# EAGLE board TSC_PROIECT2026_PCB.fbrd (EAGLE 9.7.0)
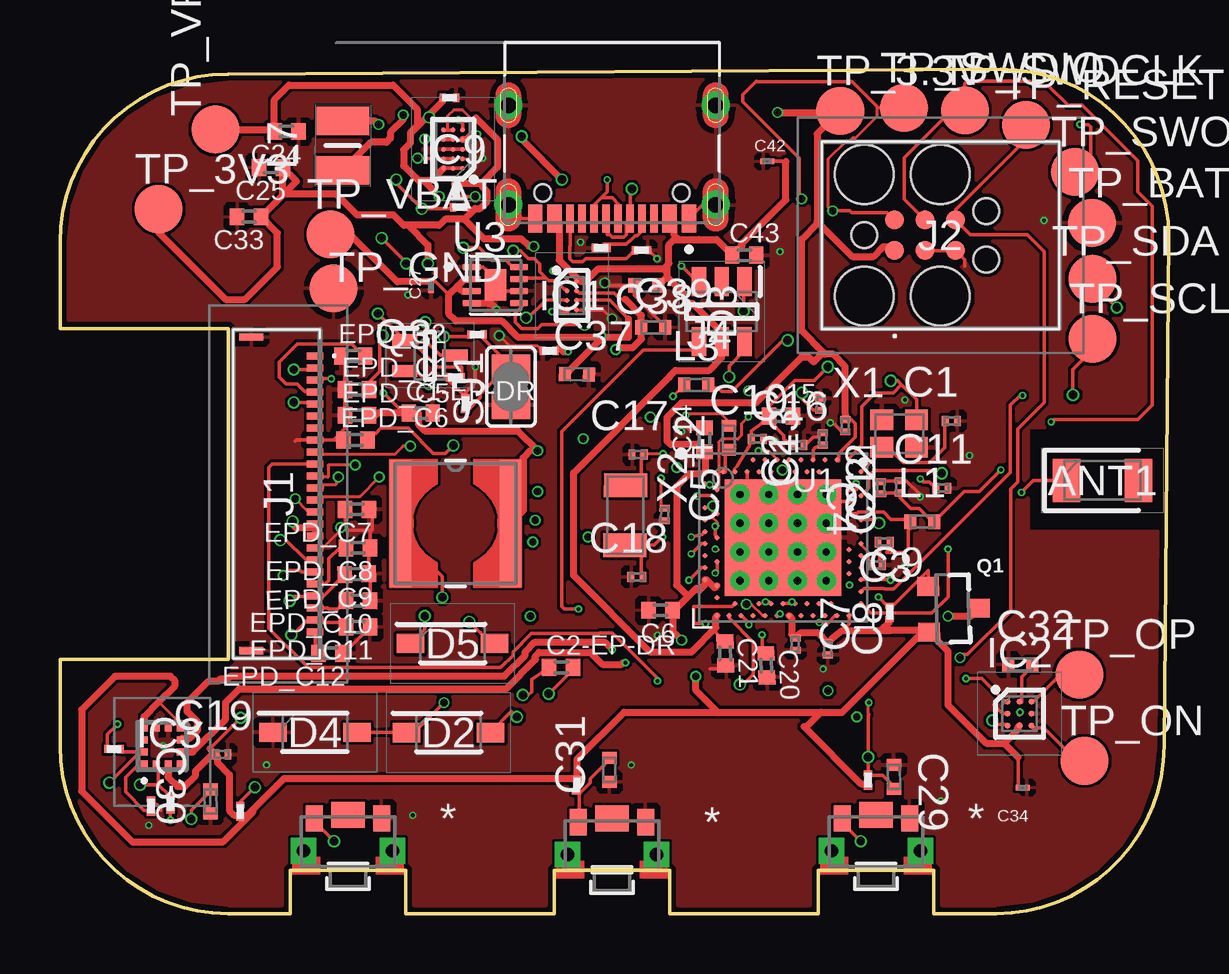
[diagram p0: board, top side]
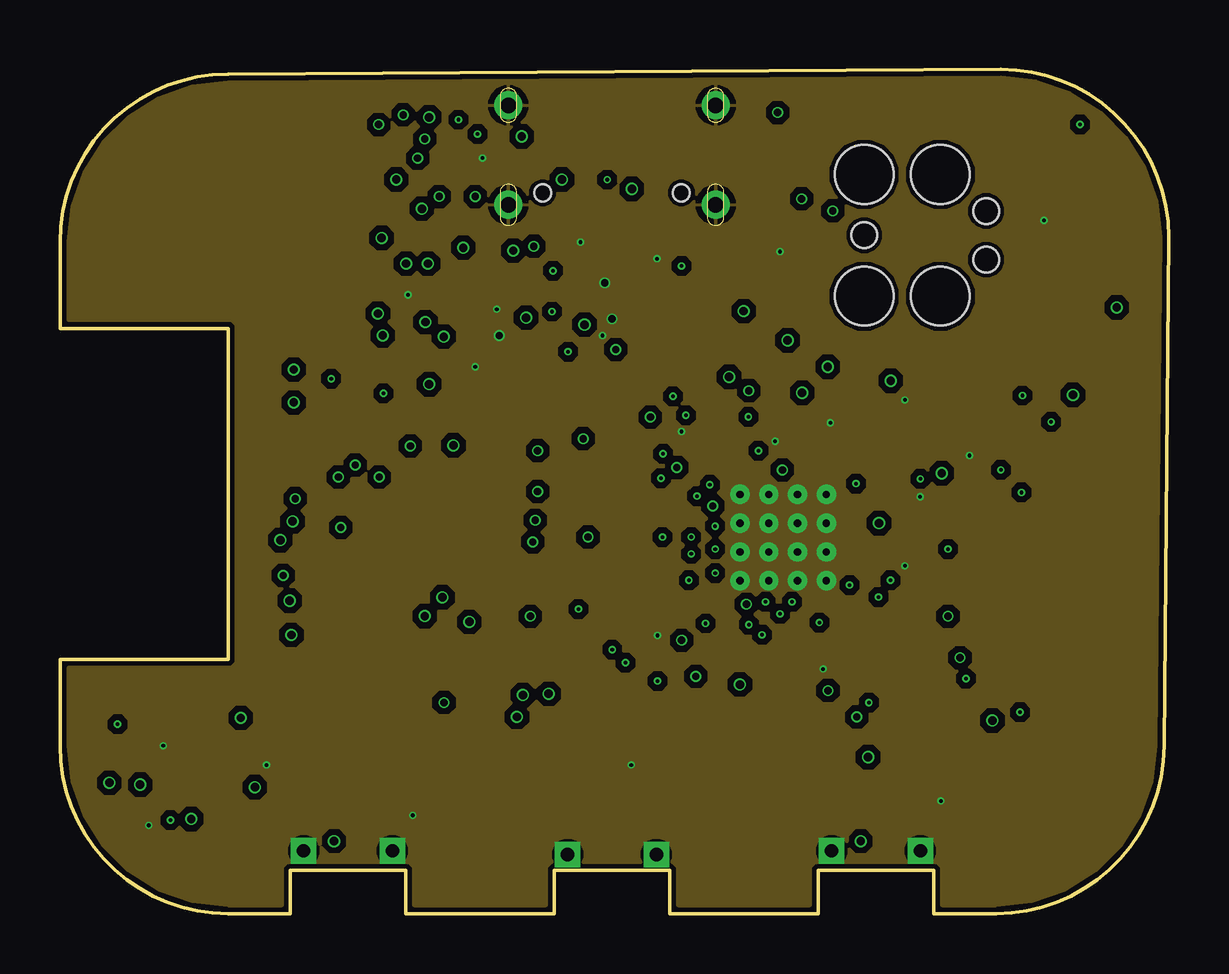
[diagram p1: board, inner layer Route2]
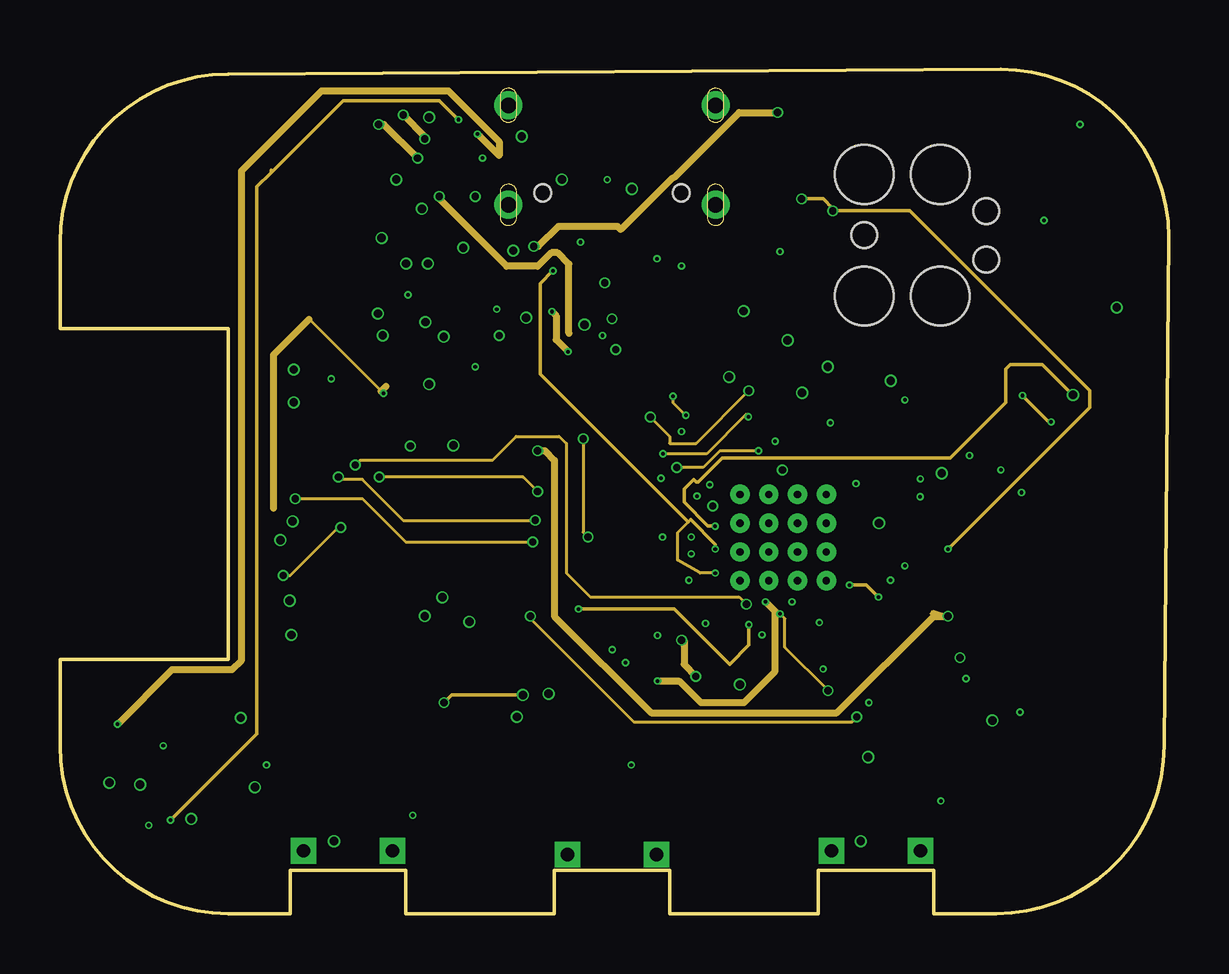
[diagram p2: board, inner layer Route63]
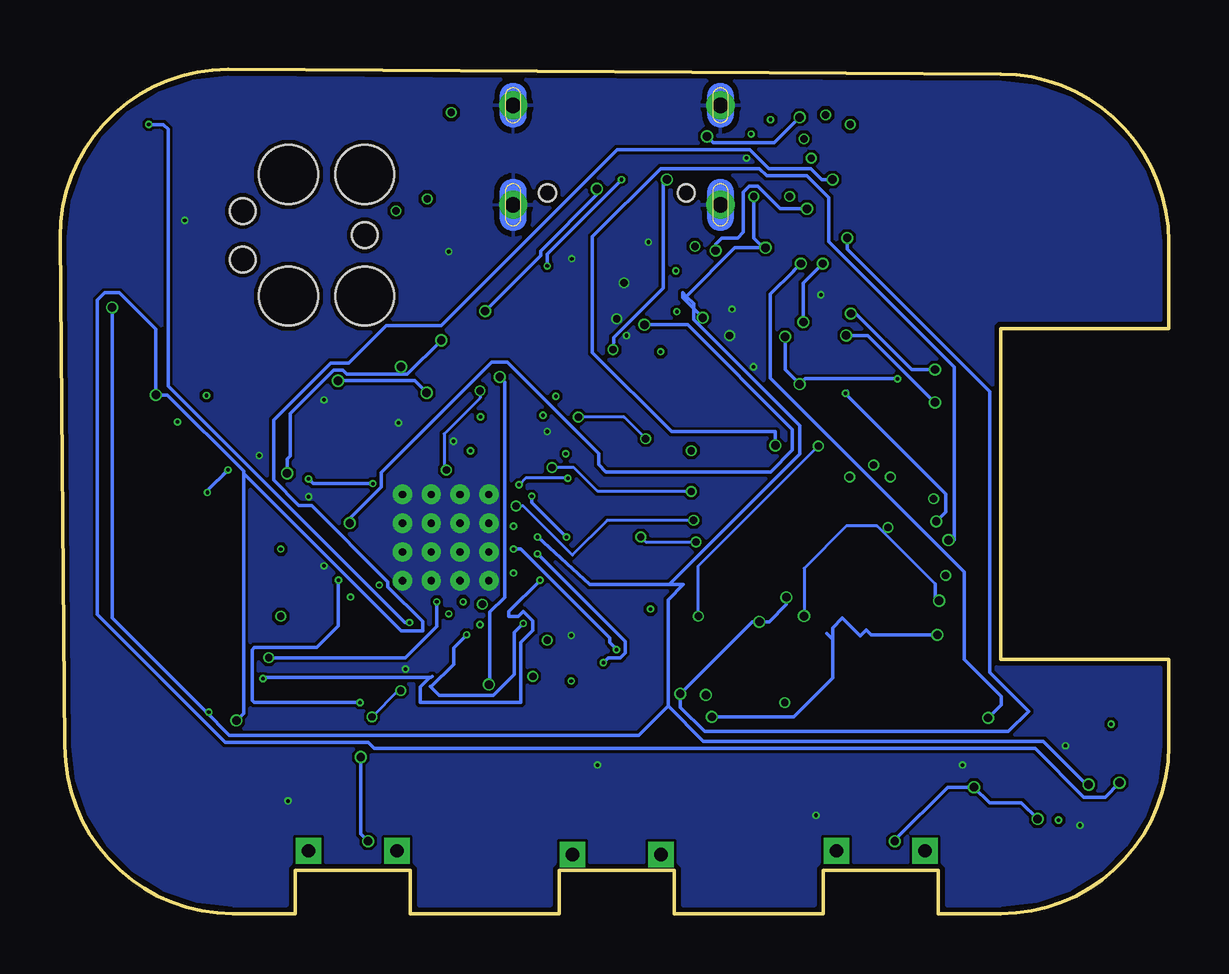
[diagram p3: board, bottom side, seen from below]

Size 46.2 x 35.2 mm. Coordinates in mm from the lower left corner, seen from the top.
Outline: 39,0 36.4,0 36.4,1.8 31.6,1.8 31.6,0 25.4,0 25.4,1.8 20.6,1.8 20.6,0 14.4,0 14.4,1.8 9.6,1.8 9.6,0 7,0 arc-90 0,7 0,10.6 7,10.6 7,24.4 0,24.4 0,28 arc-90 7,35 39.2,35.2 arc-90 46.2,28.2 46,7 arc-90 39,0
Copper layers (1+2*15+16): Top / Route2 / Route63 / Bottom
Stack-up 4 Layer Stack: Top SilkScreen Epoxy Ink / Top SolderMask SR:Green 0.0254mm Dk 4.3 / Top Surface Finish Lead-Free 0.02mm / Top CuFoil:007 0.035mm / Dielectric-1 Prepreg:001 0.064mm / Dielectric-2 Prepreg:001 0.064mm / Route2 CuFoil:007 0.035mm / Dielectric-3 Core:066 0.711mm / Route63 CuFoil:007 0.035mm / Dielectric-4 Prepreg:001 0.064mm / Dielectric-5 Prepreg:001 0.064mm / Bottom CuFoil:007 0.035mm / Bottom Surface Finish Lead-Free 0.02mm / Bottom SolderMask SR:Green 0.0254mm Dk 4.3 / Bottom SilkScreen Epoxy Ink
Design rules: minimum copper width 5mil, minimum drill size 0.15mm, copper clearance wire_polygon to wire_polygon 5mil, copper clearance wire_polygon to pad_smd 5mil, copper clearance wire_polygon to via 5mil, copper clearance pad_smd to pad_smd 5mil, copper clearance pad_smd to via 5mil, copper clearance via to via 5mil, copper clearance smd to pad (same net) 5mil, copper clearance smd to via (same net) 5mil, copper clearance smd to smd (same net) 5mil, dimension clearance 0.2mm, via restrict clearance 0mil, restrict clearance 0mil, drill distance 6mil, keepout clearance 0mil
RestrictTop: area 40.4,16 to 46.2,20.2

## Footprints (pad centres in the part's own frame; a part is rotated, then mirrored left to right if it is on the bottom)
2450AT18B100E_ANTC3216X140N = smd 1.15 x 1.8: 1 -1.5,0; 2 1.5,0
NORDIC_NRF_3_RESC0201_L = smd 0.28 x 0.43: 1 -0.255,0; 2 0.255,0
PERFECT_0402_0402 = smd 0.6 x 0.7: 1 -0.5,0; 2 0.5,0
GRM011R60J152KE01L_1_0201 = smd 0.35 x 0.25: 1 0,0.275; 2 0,-0.275
GRM011R60J152KE01L_2_CAPC0201X13N = smd 0.22 x 0.23: 1 -0.185,0; 2 0.185,0
NORDIC_NRF_3_RESC0402_L = smd 0.5 x 0.6: 1 -0.5,0; 2 0.5,0
ESP32_C6_LIBRARY_5_SOD3716X135N = smd 1.15 x 0.8: 1 -1.75,0; 2 1.75,0
ESP32_C6_LIBRARY_3_SOT95P280X145-6N = smd 1.2 x 0.6: 1 -1.25,0.95; 2 -1.25,0; 3 -1.25,-0.95; 4 1.25,-0.95; 5 1.25,0; 6 1.25,0.95
BQ25180YBGR_BGA8C40P2X4_100X155X50 = smd 0.2 x 0.2: A1 -0.2,0.6; A2 0.2,0.6; B1 -0.2,0.2; B2 0.2,0.2; C1 -0.2,-0.2; C2 0.2,-0.2; D1 -0.2,-0.6; D2 0.2,-0.6
DRV2605YZFR_BGA9C50P3X3_144X144X62 = smd 0.25 x 0.25: A1 -0.5,0.5; A2 0,0.5; A3 0.5,0.5; B1 -0.5,0; B2 0,0; B3 0.5,0; C1 -0.5,-0.5; C2 0,-0.5; C3 0.5,-0.5
BMA423_BMA423 = smd 0.3 x 0.35: 1 -0.75,-0.775; 2 -0.25,-0.775; 3 0.25,-0.775; 4 0.75,-0.775; 7 0.75,0.775; 8 0.25,0.775; 9 -0.25,0.775; 10 -0.75,0.775 | smd 0.35 x 0.3: 5 0.775,-0.25; 6 0.775,0.25; 11 -0.775,0.25; 12 -0.775,-0.25
RT6160AWSC_BGA15C40P3X5_140X230X60 = smd 0.216 x 0.216: A1 -0.4,0.8; A2 0,0.8; A3 0.4,0.8; B1 -0.4,0.4; B2 0,0.4; B3 0.4,0.4; C1 -0.4,0; C2 0,0; C3 0.4,0; D1 -0.4,-0.4; D2 0,-0.4; D3 0.4,-0.4; E1 -0.4,-0.8; E2 0,-0.8; E3 0.4,-0.8
503480-2400_5034802400 = smd 0.3 x 0.7: 1 -5.75,1.525; 2 -5.25,1.525; 3 -4.75,1.525; 4 -4.25,1.525; 5 -3.75,1.525; 6 -3.25,1.525; 7 -2.75,1.525; 8 -2.25,1.525; 9 -1.75,1.525; 10 -1.25,1.525; 11 -0.75,1.525; 12 -0.25,1.525; 13 0.25,1.525; 14 0.75,1.525; 15 1.25,1.525; 16 1.75,1.525; 17 2.25,1.525; 18 2.75,1.525; 19 3.25,1.525; 20 3.75,1.525; 21 4.25,1.525; 22 4.75,1.525; 23 5.25,1.525; 24 5.75,1.525 | smd 0.3 x 1: MP1 -6.54,-1.125; MP2 6.54,-1.125
TC2030-IDC_TC2030IDC = smd 0.783 x 0.783: 1 -0.953,-0.635; 2 -0.953,0.635; 3 0.317,-0.635; 4 0.317,0.635; 5 1.588,-0.635; 6 1.588,0.635 | hole 2.451: -2.223,-2.54; -2.223,2.54; 0.952,-2.54; 0.952,2.54 | hole 1.067: -2.223,0; 2.857,-1.016; 2.857,1.016
KH-TYPE-C-16P_KINGHELM_KH-TYPE-C-16P = smd 0.6 x 1.15: A1_B12 -3.2,4.725; A4_B9 -2.4,4.725; A9_B4 2.4,4.725; A12_B1 3.2,4.725 | smd 0.3 x 1.15: A5 -1.25,4.725; A6 -0.25,4.725; A7 0.25,4.725; A8 1.25,4.725; B5 1.75,4.725; B6 0.75,4.725; B7 -0.75,4.725; B8 -1.75,4.725 | drill 0.65 pad 1.05: SH1 -4.32,0; SH2 4.32,0; SH3 -4.32,4.15; SH4 4.32,4.15 | hole 0.7: -2.89,3.65; 2.89,3.65
NORDIC_NRF_2_RESC0402_L = smd 0.5 x 0.6: 1 -0.5,0; 2 0.5,0
ESP32_C6_LIBRARY_2_IND_4828-WE-TPC_WRE = smd 0.9 x 5.3: 1 -2.286,0; 2 2.286,0
MLP2016SR47MT0S1_INDC2016X100N = smd 1.2 x 2.2: 1 -1.028,0; 2 1.028,0
ESP32_C6_LIBRARY_4_ESP32_C6_LIBRARY_4_ESP32_C6_LIBRARY_4_ESP32_C6_LIBRARY_4_ESP32_WROVER_SPARKFUN-DISCRETESEMI_SOT23-3 = smd 0.8 x 0.9: 1 -0.95,-1; 2 0.95,-1; 3 0,1.1
ESP32_C6_LIBRARY_6_SOT65P210X110-3N = smd 1.05 x 0.5: 1 -1.05,0.65; 2 -1.05,-0.65; 3 1.05,0
ERA-1AEB3401C_0201 = smd 0.35 x 0.25: 1 0,0.275; 2 0,-0.275
CPF0201D7K68C1_0201 = smd 0.35 x 0.25: 1 0,0.275; 2 0,-0.275
ESP32_C6_LIBRARY_7_JUMPER_SJ = smd 1.168 x 1.6: 1 -0.762,0; 2 0.762,0
2025-10-22_07-23-44_LIBRARY_SW_EVP-AKE31A_PAN = smd 0.711 x 1.092: 1 -1.4,-0.972; 2 1.4,-0.972 | drill 0.559 pad 0.914 square: 3 -1.848,0.381; 4 1.848,0.381 | smd 1.397 x 1.092: 5 0,-1.124
HECTOR_WATCH_1_TP20R = smd 2 x 2: TP 0,0
NORDIC_NRF_4_AQFN50P700X700X85_HS-74N = smd 4.85 x 4.85: P$74 0,0 | drill 0.3 pad 0.6: P$75 -1.8,1.8; P$76 -0.6,1.8; P$77 0.6,1.8; P$78 1.8,1.8; P$79 -1.8,0.6; P$80 -0.6,0.6; P$81 0.6,0.6; P$82 1.8,0.6; P$83 -1.8,-0.6; P$84 -0.6,-0.6; P$85 0.6,-0.6; P$86 1.8,-0.6; P$87 -1.8,-1.8; P$88 -0.6,-1.8; P$89 0.6,-1.8; P$90 1.8,-1.8 | smd 0.2 x 0.2: P$A8 -1.25,3.25; P$A10 -0.75,3.25; P$A12 -0.25,3.25; P$A14 0.25,3.25; P$A16 0.75,3.25; P$A18 1.25,3.25; P$A20 1.75,3.25; P$A22 2.25,3.25; P$A23 2.75,3.25; P$AA24 3.25,-2.25; P$AB2 -2.75,-2.5; P$AC5 -2,-2.75; P$AC9 -1,-2.75; P$AC11 -0.5,-2.75; P$AC13 0,-2.75; P$AC15 0.5,-2.75; P$AC17 1,-2.75; P$AC19 1.5,-2.75; P$AC21 2,-2.75; P$AC24 3.25,-2.75; P$AD2 -2.75,-3.25; P$AD4 -2.25,-3.25; P$AD6 -1.75,-3.25; P$AD8 -1.25,-3.25; P$AD10 -0.75,-3.25; P$AD12 -0.25,-3.25; P$AD14 0.25,-3.25; P$AD16 0.75,-3.25; P$AD18 1.25,-3.25; P$AD20 1.75,-3.25; P$AD22 2.25,-3.25; P$AD23 2.75,-3.25; P$B1 -3.25,2.75; P$B3 -2.5,2.75; P$B5 -2,2.75; P$B7 -1.5,2.75; P$B9 -1,2.75; P$B11 -0.5,2.75; P$B13 0,2.75; P$B15 0.5,2.75; P$B17 1,2.75; P$B19 1.5,2.75; P$B24 3.25,2.75; P$C1 -3.25,2.25; P$D2 -2.75,2; P$D23 2.75,2; P$E24 3.25,1.75; P$F2 -2.75,1.5; P$F23 2.75,1.5; P$G1 -3.25,1.25; P$H2 -2.75,1; P$H23 2.75,1; P$J1 -3.25,0.75; P$J24 3.25,0.75; P$K2 -2.75,0.5; P$L1 -3.25,0.25; P$L24 3.25,0.25; P$M2 -2.75,0; P$N1 -3.25,-0.25; P$N24 3.25,-0.25; P$P2 -2.75,-0.5; P$P23 2.75,-0.5; P$R1 -3.25,-0.75; P$R24 3.25,-0.75; P$T2 -2.75,-1; P$T23 2.75,-1; P$U1 -3.25,-1.25; P$U24 3.25,-1.25; P$V23 2.75,-1.5; P$W1 -3.25,-1.75; P$W24 3.25,-1.75; P$Y2 -2.75,-2; P$Y23 2.75,-2
ESP32_C6_LIBRARY_SON50P200X200X80-9N = smd 0.76 x 0.27: 1 -0.985,0.75; 2 -0.985,0.25; 3 -0.985,-0.25; 4 -0.985,-0.75; 5 0.985,-0.75; 6 0.985,-0.25; 7 0.985,0.25; 8 0.985,0.75 | smd 0.9 x 1.3: 9 0,0
NORDIC_NRF_BT-XTAL_2016_N = smd 0.95 x 0.85: 1 -0.725,-0.575; 2 0.725,-0.575; 3 0.725,0.575; 4 -0.725,0.575
NORDIC_NRF_1_XTAL_3215_N = smd 1 x 1.8: 1 -1.25,0; 2 1.25,0

## Placement (x,y rotation side)
ANT1  2450AT18B100E_2450AT18B100E  [2450AT18B100E_ANTC3216X140N]  43.44,18.06 0 top
C1  12pF  [NORDIC_NRF_3_RESC0201_L]  37.14,20.54 0 top
C1-EP-DR  10uF  [PERFECT_0402_0402]  15.03,20.87 0 top
C2  12pF  [NORDIC_NRF_3_RESC0201_L]  31.69,21.24 89.5 top
C2-EP-DR  4.7uF/25V  [PERFECT_0402_0402]  20.88,10.27 0 top
C3  1pF  [NORDIC_NRF_3_RESC0201_L]  34.34,15.49 180 top
C4  1pF  [NORDIC_NRF_3_RESC0201_L]  34.2,17.76 90.4 top
C5  100nF  [NORDIC_NRF_3_RESC0201_L]  25.19,16.64 268.9 top
C6  4.7uF  [PERFECT_0402_0402]  25.03,12.65 180 top
C7  100nF  [NORDIC_NRF_3_RESC0201_L]  30.64,11.24 270 top
C8  100nF  [NORDIC_NRF_3_RESC0201_L]  31.99,11.04 270 top
C9  820pF N.C.  [NORDIC_NRF_3_RESC0201_L]  34,14.54 0 top
C10  N.C.  [NORDIC_NRF_3_RESC0201_L]  29.06,19.79 0 top
C11  100pF  [NORDIC_NRF_3_RESC0201_L]  36.74,17.74 0 top
C12  100nF  [NORDIC_NRF_3_RESC0201_L]  32.72,20.34 270 top
C13  N.C.  [NORDIC_NRF_3_RESC0201_L]  31.78,19.79 90 top
C14  4.7uF  [PERFECT_0402_0402]  26.85,19.75 90 top
C15  1.0uF  [PERFECT_0402_0402]  30.04,20.75 0 top
C16  47nF  [NORDIC_NRF_3_RESC0201_L]  30.74,19.54 0 top
C17  12pF  [NORDIC_NRF_3_RESC0201_L]  24.09,19.14 0 top
C18  12pF  [NORDIC_NRF_3_RESC0201_L]  24.04,14.04 0 top
C19  100nF  [NORDIC_NRF_3_RESC0201_L]  6.74,6.64 0 top
C20  4.7uF  [PERFECT_0402_0402]  29.43,10.35 272.4 top
C21  4.7uF  [PERFECT_0402_0402]  27.72,10.85 271.7 top
C22  N.C.  [NORDIC_NRF_3_RESC0201_L]  35,17.79 90 top
C23  0.1uF  [GRM011R60J152KE01L_1_0201]  16.23,34.01 269.1 top
C24  10uF  [PERFECT_0402_0402]  9.43,32.61 180 top
C25  22uF  [PERFECT_0402_0402]  8.79,31.11 180 top
C27  0.1uF  [GRM011R60J152KE01L_2_CAPC0201X13N]  15.45,26.16 90 top
C29  1uF  [NORDIC_NRF_3_RESC0402_L]  34.75,5.7 270.5 top
C30  1uF  [NORDIC_NRF_3_RESC0402_L]  6.27,4.69 90.2 top
C31  1uF  [NORDIC_NRF_3_RESC0402_L]  22.89,5.99 90 top
C32  1uF  [NORDIC_NRF_3_RESC0402_L]  40.01,10.39 0 top
C33  22uF  [PERFECT_0402_0402]  7.88,29.05 180 top
C34  0.1uF  [GRM011R60J152KE01L_2_CAPC0201X13N]  40.11,5.26 179.6 top
C37  1uF  [NORDIC_NRF_3_RESC0402_L]  21.54,22.49 359.1 top
C38  1uF  [NORDIC_NRF_3_RESC0402_L]  24.42,26.19 0 top
C39  10uF  [NORDIC_NRF_3_RESC0402_L]  24.72,24.44 0 top
C42  0.1uF  [GRM011R60J152KE01L_2_CAPC0201X13N]  29.47,31.36 0 top
C43  4.7uF  [PERFECT_0402_0402]  28.51,27.45 0 top
D2  MBR0530  [ESP32_C6_LIBRARY_5_SOD3716X135N]  16.19,7.55 0 top
D3  USBLC6-2SC6Y  [ESP32_C6_LIBRARY_3_SOT95P280X145-6N]  27.57,25.1 270 top
D4  MBR0530  [ESP32_C6_LIBRARY_5_SOD3716X135N]  10.62,7.56 0 top
D5  MBR0530  [ESP32_C6_LIBRARY_5_SOD3716X135N]  16.36,11.26 0 top
EPD_C1  1uF/50V  [PERFECT_0402_0402]  12.37,21.85 0 top
EPD_C2  1uF/50V  [PERFECT_0402_0402]  12.22,23.25 0 top
EPD_C5  1uF/50V  [PERFECT_0402_0402]  12.37,20.78 0 top
EPD_C6  1uF/50V  [PERFECT_0402_0402]  12.32,19.75 0 top
EPD_C7  1uF/50V  [PERFECT_0402_0402]  12.37,16.85 180 top
EPD_C8  1uF/50V  [PERFECT_0402_0402]  12.42,15.25 180 top
EPD_C9  1uF/50V  [PERFECT_0402_0402]  12.37,14.15 182.1 top
EPD_C10  1uF/50V  [PERFECT_0402_0402]  12.42,13.05 179.4 top
EPD_C11  1uF/50V  [PERFECT_0402_0402]  12.42,11.95 180 top
EPD_C12  1uF/50V  [PERFECT_0402_0402]  11.27,10.85 180 top
IC1  BQ25180YBGR  [BQ25180YBGR_BGA8C40P2X4_100X155X50]  21.33,25.77 0 top
IC2  DRV2605YZFR  [DRV2605YZFR_BGA9C50P3X3_144X144X62]  39.98,8.34 0 top
IC3  BMA423  [BMA423_BMA423]  4.26,6.99 0 top
IC9  RT6160AWSC  [RT6160AWSC_BGA15C40P3X5_140X230X60]  16.38,31.87 180 top
J1  503480-2400  [503480-2400_5034802400]  9.1,17.5 270 top
J2  TC2030-IDC  [TC2030-IDC_TC2030IDC]  35.73,28.28 0 top
J4  KH-TYPE-C-16P  [KH-TYPE-C-16P_KINGHELM_KH-TYPE-C-16P]  23,33.7 180 top
L1  3.9nH  [NORDIC_NRF_2_RESC0402_L]  35.92,16.34 0 top
L2  10uH  [NORDIC_NRF_2_RESC0402_L]  27.87,19.84 89.6 top
L3  15nH  [NORDIC_NRF_2_RESC0402_L]  26.52,22.04 0 top
L5  68uH  [ESP32_C6_LIBRARY_2_IND_4828-WE-TPC_WRE]  16.48,16.27 0 top
L7  FTC252012SR47MBCA  [MLP2016SR47MT0S1_INDC2016X100N]  11.79,32.02 269.7 top
Q1  20V/4.2A/52mΩ/1.4W  [ESP32_C6_LIBRARY_4_ESP32_C6_LIBRARY_4_ESP32_C6_LIBRARY_4_ESP32_C6_LIBRARY_4_ESP32_WROVER_SPARKFUN-DISCRETESEMI_SOT23-3]  37.19,12.71 271.2 top
Q3  SI1308EDL-T1-GE3  [ESP32_C6_LIBRARY_6_SOT65P210X110-3N]  15.41,23.26 0 top
R1_EP_DR  0.47  [ERA-1AEB3401C_0201]  17.38,24.15 271.2 top
R1_USB  5K1  [CPF0201D7K68C1_0201]  22.55,27.76 90 top
R2  0  [ERA-1AEB3401C_0201]  4.61,4.59 0 top
R2_EP_DR  10K  [ERA-1AEB3401C_0201]  16.47,22.36 90.2 top
R2_USB  5K1  [CPF0201D7K68C1_0201]  24.23,27.66 90.3 top
R3  0  [CPF0201D7K68C1_0201]  3.79,4.49 0 top
R4  0  [ERA-1AEB3401C_0201]  2.25,6.86 268.8 top
R5  10k  [CPF0201D7K68C1_0201]  7.51,4.26 0 top
R7  10k  [CPF0201D7K68C1_0201]  33.67,5.57 0 top
R8  10k  [CPF0201D7K68C1_0201]  21.53,5.36 176.4 top
R9  10K  [ERA-1AEB3401C_0201]  20.39,23.46 90 top
R17  3K3  [ERA-1AEB3401C_0201]  16.65,29.46 272 top
R18  3K3  [ERA-1AEB3401C_0201]  16.51,30.15 1.4 top
R_PWR_EPD  10K  [CPF0201D7K68C1_0201]  34.57,12.56 0 top
R_TYPE_SEL  2.2  [ERA-1AEB3401C_0201]  16.89,21.26 358.6 top
SJ1  0  [ESP32_C6_LIBRARY_7_JUMPER_SJ]  18.79,21.97 90 top
SW_DN  2025-10-22_07-23-44_LIBRARY_EVP-AKE31ASW_EVP-AKE31A_PAN  [2025-10-22_07-23-44_LIBRARY_SW_EVP-AKE31A_PAN]  34,3 180 top
SW_ENT  2025-10-22_07-23-44_LIBRARY_EVP-AKE31ASW_EVP-AKE31A_PAN  [2025-10-22_07-23-44_LIBRARY_SW_EVP-AKE31A_PAN]  23,2.85 180 top
SW_UP  2025-10-22_07-23-44_LIBRARY_EVP-AKE31ASW_EVP-AKE31A_PAN  [2025-10-22_07-23-44_LIBRARY_SW_EVP-AKE31A_PAN]  12,3 180 top
TP_3.3V  HECTOR_WATCH_1_TPTP20R  [HECTOR_WATCH_1_TP20R]  32.51,33.47 0 top
TP_3V3  HECTOR_WATCH_1_TPTP20R  [HECTOR_WATCH_1_TP20R]  4.11,29.37 0 top
TP_BAT_GND  HECTOR_WATCH_1_TPTP20R  [HECTOR_WATCH_1_TP20R]  43,28.79 0 top
TP_GND  HECTOR_WATCH_1_TPTP20R  [HECTOR_WATCH_1_TP20R]  11.4,26.07 0 top
TP_ON  HECTOR_WATCH_1_TPTP20R  [HECTOR_WATCH_1_TP20R]  42.69,6.37 0 top
TP_OP  HECTOR_WATCH_1_TPTP20R  [HECTOR_WATCH_1_TP20R]  42.47,9.97 0 top
TP_RESET  HECTOR_WATCH_1_TPTP20R  [HECTOR_WATCH_1_TP20R]  40.25,32.89 0 top
TP_SCL  HECTOR_WATCH_1_TPTP20R  [HECTOR_WATCH_1_TP20R]  43.03,23.97 0 top
TP_SDA  HECTOR_WATCH_1_TPTP20R  [HECTOR_WATCH_1_TP20R]  43.02,26.47 0 top
TP_SWDCLK  HECTOR_WATCH_1_TPTP20R  [HECTOR_WATCH_1_TP20R]  37.7,33.49 0 top
TP_SWDIO  HECTOR_WATCH_1_TPTP20R  [HECTOR_WATCH_1_TP20R]  35.17,33.59 0 top
TP_SWO  HECTOR_WATCH_1_TPTP20R  [HECTOR_WATCH_1_TP20R]  42.29,30.92 0 top
TP_VBAT  HECTOR_WATCH_1_TPTP20R  [HECTOR_WATCH_1_TP20R]  11.28,28.32 0 top
TP_VREG  HECTOR_WATCH_1_TPTP20R  [HECTOR_WATCH_1_TP20R]  6.48,32.69 0 top
U1  NRF52840_QF  [NORDIC_NRF_4_AQFN50P700X700X85_HS-74N]  30.13,15.68 0 top
U3  MAX17048G+T10  [ESP32_C6_LIBRARY_SON50P200X200X80-9N]  18.14,26.21 0 top
X1  32MHz  [NORDIC_NRF_BT-XTAL_2016_N]  34.96,20.01 0 top
X2  32.768kHz  [NORDIC_NRF_1_XTAL_3215_N]  23.55,16.61 269.2 top

## Library data of the parts
ANT1 = InkTime_v5 (1); ARROW_PART_NUMBER: 2450AT18B100E; ARROW_PRICE-STOCK: https://www.arrow.com/en/products/2450at18b100e/johanson-dielectrics?utm_currency=USD&region=nac; DESCRIPTION: Antennas 2.45GHz ANTENNA; HEIGHT: 1.4mm; MANUFACTURER_NAME: JOHANSON TECHNOLOGY; MANUFACTURER_PART_NUMBER: 2450AT18B100E; MOUSER_PART_NUMBER: 609-2450AT18B100E; MOUSER_PRICE-STOCK: https://www.mouser.co.uk/ProductDetail/Johanson-Technology/2450AT18B100E?qs=yCnrNFeXz%252Bh5MFsFIXGZGA%3D%3D
C1 C1-EP-DR C2 C2-EP-DR C3-C25 C29-C33 C37-C39 C43 EPD_C1 EPD_C2 EPD_C5-EPD_C12 L1-L3 R1_EP_DR R1_USB R2 R2_EP_DR R2_USB R3-R5 R7-R9 R17 R18 R_PWR_EPD R_TYPE_SEL SJ1 TP_3.3V TP_3V3 TP_BAT_GND TP_GND TP_ON TP_OP TP_RESET TP_SCL TP_SDA TP_SWDCLK TP_SWDIO TP_SWO TP_VBAT TP_VREG U1 X1 X2 = InkTime_v5 (1)
C27 C34 C42 = InkTime_v5 (1); AVAILABILITY: In Stock; CHECK_PRICES: https://www.snapeda.com/parts/GRM011R60J152KE01L/Murata/view-part/?ref=eda; DESCRIPTION: SMD Capacitor X5R(EIA) with Capacitance: 1500pF Tol. 10%. Rated Voltage: 6.3Vdc; MF: Murata; MP: GRM011R60J152KE01L; PACKAGE: 0201 Murata; PRICE: None; SNAPEDA_LINK: https://www.snapeda.com/parts/GRM011R60J152KE01L/Murata/view-part/?ref=snap
D2 D4 D5 = InkTime_v5 (1); AVAILABILITY: In Stock; CHECK_PRICES: https://www.snapeda.com/parts/MBR0530/Onsemi/view-part/?ref=eda; DESCRIPTION: Diode Schottky 30 V 500mA Surface Mount SOD-123; MF: ON Semiconductor; MP: MBR0530; PACKAGE: SOD-123-2 ON Semiconductor; PRICE: None; PURCHASE-URL: https://www.snapeda.com/api/url_track_click_mouser/?unipart_id=179458&manufacturer=ON Semiconductor&part_name=MBR0530&search_term=None; SNAPEDA_LINK: https://www.snapeda.com/parts/MBR0530/Onsemi/view-part/?ref=snap
D3 = InkTime_v5 (1); AVAILABILITY: In Stock; CHECK_PRICES: https://www.snapeda.com/parts/USBLC6-2SC6Y/STMicroelectronics/view-part/?ref=eda; DESCRIPTION: 17V Clamp 5A (8/20µs) Ipp Tvs Diode Surface Mount SOT-23-6; MF: STMicroelectronics; MP: USBLC6-2SC6Y; PACKAGE: SOT-23-6 STMicroelectronics; PRICE: None; SNAPEDA_LINK: https://www.snapeda.com/parts/USBLC6-2SC6Y/STMicroelectronics/view-part/?ref=snap
IC1 = InkTime_v5 (1); ARROW_PART_NUMBER: BQ25180YBGR; ARROW_PRICE-STOCK: https://www.arrow.com/en/products/bq25180ybgr/texas-instruments?utm_currency=USD&region=nac; DESCRIPTION: Charger IC Lithium Ion/Polymer, Lithium Iron Phosphate 8-DSBGA (1.6x1.1); HEIGHT: 0.5mm; MANUFACTURER_NAME: Texas Instruments; MANUFACTURER_PART_NUMBER: BQ25180YBGR; MOUSER_PART_NUMBER: 595-BQ25180YBGR; MOUSER_PRICE-STOCK: https://www.mouser.co.uk/ProductDetail/Texas-Instruments/BQ25180YBGR?qs=doiCPypUmgEWjAK%252BJAX6Tw%3D%3D
IC2 = InkTime_v5 (1); ARROW_PART_NUMBER: DRV2605YZFR; ARROW_PRICE-STOCK: https://www.arrow.com/en/products/drv2605yzfr/texas-instruments?region=nac; DESCRIPTION: Haptic Driver for ERM/LRA with Built-In Library and Smart Loop Architecture; HEIGHT: 0.625mm; MANUFACTURER_NAME: Texas Instruments; MANUFACTURER_PART_NUMBER: DRV2605YZFR
IC3 = InkTime_v5 (1); ARROW_PART_NUMBER: BMA423; ARROW_PRICE-STOCK: https://www.arrow.com/en/products/bma423/bosch; DESCRIPTION: Accelerometers Triaxial low-g 12bit Acceleration Sensor; HEIGHT: 1mm; MANUFACTURER_NAME: BOSCH; MANUFACTURER_PART_NUMBER: BMA423; MOUSER_PART_NUMBER: 262-BMA423; MOUSER_PRICE-STOCK: https://www.mouser.co.uk/ProductDetail/Bosch-Sensortec/BMA423?qs=HXFqYaX1Q2xC%252BSgeGoX3mg%3D%3D
IC9 = InkTime_v5 (1); DESCRIPTION: Buck-Boost Regulator Positive Output Step-Up/Step-Down I2C DC-DC Controller IC 15-WL-CSP (BSC) (1.4x2.3); HEIGHT: 0.6mm; MANUFACTURER_NAME: RICHTEK; MANUFACTURER_PART_NUMBER: RT6160AWSC; MOUSER_PART_NUMBER: 835-RT6160AWSC; MOUSER_PRICE-STOCK: https://www.mouser.co.uk/ProductDetail/Richtek/RT6160AWSC?qs=amGC7iS6iy%2FLd9PSoixZXQ%3D%3D
J1 = InkTime_v5 (1); DESCRIPTION: FFC & FPC Connectors 0.5mm FPC RA SMT Dual Contact 24Ckt; HEIGHT: 1.87mm; MANUFACTURER_NAME: Molex; MANUFACTURER_PART_NUMBER: 503480-2400; MOUSER_PART_NUMBER: 538-503480-2400; MOUSER_PRICE-STOCK: https://www.mouser.co.uk/ProductDetail/Molex/503480-2400?qs=OAhjpuo3Vu7efIoxFh9AOw%3D%3D
J2 = InkTime_v5 (1); DESCRIPTION: CABLE ADAPTER 6 POS; HEIGHT: 19mm; MANUFACTURER_NAME: Tag Connect; MANUFACTURER_PART_NUMBER: TC2030-IDC
J4 = InkTime_v5 (1); AVAILABILITY: Not in stock; CHECK_PRICES: https://www.snapeda.com/parts/KH-TYPE-C-16P/Kinghelm/view-part/?ref=eda; MF: kinghelm; MP: KH-TYPE-C-16P; PACKAGE: None; PRICE: None; SNAPEDA_LINK: https://www.snapeda.com/parts/KH-TYPE-C-16P/Kinghelm/view-part/?ref=snap
L5 = inktime; COPYRIGHT: Copyright (C) 2024 Ultra Librarian. All rights reserved.; MANUFACTURER_PART_NUMBER: 744043680; MFR_NAME: Wurth Electronics
L7 = InkTime_v5 (1); DESCRIPTION: SMD / SMT Inductors (Coils), L=0.47?H, L x W x T :; HEIGHT: 1mm; JLCPCB: https://jlcpcb.com/partdetail/6763488-FTC252012SR47MBCA/C5832368; MANUFACTURER_NAME: TDK; MANUFACTURER_PART_NUMBER: FTC252012SR47MBCA
Q1 = InkTime_v5 (1); PROD_ID: TRAN-14388
Q3 = InkTime_v5 (1); AVAILABILITY: In Stock; CHECK_PRICES: https://www.snapeda.com/parts/SI1308EDL-T1-GE3/Vishay+Siliconix/view-part/?ref=eda; DESCRIPTION: Si1308EDL-T1-GE3 N-channel MOSFET Transistor, 1.5 A, 30 V, 3-Pin SC-70 | Siliconix / Vishay SI1308EDL-T1-GE3; MF: Vishay Siliconix; MP: SI1308EDL-T1-GE3; PACKAGE: SOT-323 Vishay Semiconductor; PRICE: None; PURCHASE-URL: https://www.snapeda.com/api/url_track_click_mouser/?unipart_id=274603&manufacturer=Vishay Siliconix&part_name=SI1308EDL-T1-GE3&search_term=None; SNAPEDA_LINK: https://www.snapeda.com/parts/SI1308EDL-T1-GE3/Vishay+Siliconix/view-part/?ref=snap
SW_DN SW_ENT SW_UP = InkTime_v5 (1); COPYRIGHT: Copyright (C) 2025 Ultra Librarian. All rights reserved.; DIGI-KEY_PART_NUMBER_1: P123437TR-ND; DIGI-KEY_PART_NUMBER_2: P123437CT-ND; DIGI-KEY_PART_NUMBER_3: P123437DKR-ND; MANUFACTURER_NAME: Panasonic; MANUFACTURER_PART_NUMBER: EVP-AKE31A
U3 = InkTime_v5 (1); AVAILABILITY: In Stock; CHECK_PRICES: https://www.snapeda.com/parts/MAX17048G+T10/Analog+Devices/view-part/?ref=eda; DESCRIPTION: 3µA 1-Cell/2-Cell Fuel Gauge with ModelGauge; MF: Analog Devices; MP: MAX17048G+T10; PACKAGE: TDFN-8 Maxim; PRICE: None; PURCHASE-URL: https://www.snapeda.com/api/url_track_click_mouser/?unipart_id=329239&manufacturer=Analog Devices&part_name=MAX17048G+T10&search_term=None; SNAPEDA_LINK: https://www.snapeda.com/parts/MAX17048G+T10/Analog+Devices/view-part/?ref=snap

## Nets
3V3: C6.1 C7.1 C8.1 C12.1 C14.1 C19.1 C25.1 C33.1 C34.2 IC2.C2 IC3.3 IC3.7 IC3.10 IC9.E2 IC9.E3 J2.1 Q1.2 R5.2 R7.2 R8.2 R17.1 R18.1 R_PWR_EPD.2 TP_3.3V.TP TP_3V3.TP U1.P$A22 U1.P$AD14 U1.P$AD23 U1.P$B1 U1.P$W1 U1.P$Y2
ALERT: U1.P$J24 U3.5
D+: D3.4 U1.P$AD6
D-: D3.6 U1.P$AD4
DEC1: C5.1 U1.P$C1
DEC3: C11.1 U1.P$D23
DEC4_6: C10.1 C15.1 C16.1 L3.2 U1.P$B5 U1.P$E24
DN: D3.1 J4.A7 J4.B7
DP: D3.3 J4.A6 J4.B6
EPD_3V3: C1-EP-DR.1 EPD_C5.2 J1.15 J1.16 L5.2 Q1.3
EPD_BUSY: J1.9 U1.P$AD12
EPD_CS: J1.12 U1.P$K2
EPD_DC: J1.11 U1.P$AD10
EPD_RST: J1.10 U1.P$AC11
GDR: J1.2 Q3.1 R2_EP_DR.2
GND: C1-EP-DR.2 C1.2 C2.2 C3.2 C4.2 C5.2 C6.2 C7.2 C8.2 C9.2 C10.2 C11.2 C12.2 C13.2 C14.2 C15.2 C16.2 C17.1 C18.1 C19.2 C20.2 C21.2 C22.2 C23.1 C24.1 C25.2 C27.1 C29.1 C30.1 C31.1 C32.1 C33.2 C34.1 C37.2 C38.1 C39.2 C42.1 C43.2 D3.2 D4.1 EPD_C1.1 EPD_C2.1 EPD_C5.1 EPD_C6.1 EPD_C7.1 EPD_C8.1 EPD_C9.1 EPD_C10.1 EPD_C11.1 EPD_C12.1 IC1.D2 IC2.B1 IC2.B3 IC3.8 IC3.9 IC9.B1 IC9.C1 IC9.C2 IC9.C3 J1.8 J1.17 J1.MP1 J1.MP2 J2.3 J2.5 J4.A1_B12 J4.A12_B1 J4.SH1 J4.SH2 J4.SH3 J4.SH4 R1_USB.1 R2_EP_DR.1 R2_USB.2 R3.1 R9.1 R_TYPE_SEL.1 SJ1.1 SW_DN.1 SW_ENT.1 SW_UP.1 TP_BAT_GND.TP TP_GND.TP U1.P$74 U1.P$75 U1.P$76 U1.P$77 U1.P$78 U1.P$79 U1.P$80 U1.P$81 U1.P$82 U1.P$83 U1.P$84 U1.P$85 U1.P$86 U1.P$87 U1.P$88 U1.P$89 U1.P$90 U1.P$B7 U1.P$F23 U3.1 U3.4 U3.6 U3.9 X1.2 X1.4
HAPTIC_EN: IC2.A1 U1.P$U1
IMU_INT1: IC3.5 U1.P$N1
IMU_INT2: IC3.6 U1.P$P2
LX1: IC9.B2 IC9.B3 L7.1
LX2: IC9.D2 IC9.D3 L7.2
MOSI: J1.14 U1.P$B13
N$1: ANT1.1 C4.1 C22.1 L1.2
N$2: IC9.D1 R4.2
N$3: IC1.D1 R9.2
N$4: C2.1 U1.P$A23 X1.3
N$5: IC9.E1 R2.2
N$6: J4.A5 R1_USB.2
N$7: L2.2 L3.1
N$8: IC3.1 R3.2
N$9: C1.1 U1.P$B24 X1.1
N$10: C3.1 L1.1 U1.P$H23
N$11: C32.2 IC2.A2
N$13: C2-EP-DR.1 D2.1 D4.2
N$14: C9.1 U1.P$N24
N$15: R1_EP_DR.1 R_TYPE_SEL.2 SJ1.2
N$16: C2-EP-DR.2 D5.2 L5.1 Q3.3
N$17: EPD_C2.2 J1.4
N$18: EPD_C1.2 J1.5
N$20: C20.1 U1.P$AC5
N$22: L2.1 U1.P$B3
N$26: J4.B5 R2_USB.1
N$30: EPD_C6.2 J1.18
N$31: EPD_C7.2 J1.19
N$32: EPD_C8.2 J1.20
N$34: EPD_C10.2 J1.22
N$35: C13.1 U1.P$A18
N$37: EPD_C12.2 J1.24
OUT+: IC2.A3 TP_OP.TP
OUT-: IC2.C3 TP_ON.TP
P0.00/XL1: C17.2 U1.P$D2 X2.1
P0.01/XL2: C18.2 U1.P$F2 X2.2
P0.04: U1.P$J1
P0.09: U1.P$L24
P0.13: C30.2 R5.1 SW_UP.2
P0.14: C31.2 R8.1 SW_ENT.2
P0.19: U1.P$AC15
P0.20: U1.P$AD16
P0.21: U1.P$AC17
P0.22: U1.P$AD18
P0.23: U1.P$AC19
P0.24: U1.P$AD20
P0.25: U1.P$AC21
P0.26: U1.P$G1
P0.27: U1.P$H2
P0.28: U1.P$B11
P0.29: U1.P$A10
P0.30: U1.P$B9
P0.31: U1.P$A8
P1.01: Q1.1 R_PWR_EPD.1 U1.P$Y23
P1.02: C29.2 R7.1 SW_DN.2 U1.P$W24
P1.03: U1.P$V23
P1.04: U1.P$U24
P1.05: U1.P$T23
P1.06: U1.P$R24
P1.07: U1.P$P23
P1.09: U1.P$R1
P1.10: U1.P$A20
P1.11: U1.P$B19
P1.12: U1.P$B17
P1.13: U1.P$A16
P1.14: U1.P$B15
P1.15: U1.P$A14
PMIC_INT: IC1.A1 U1.P$T2
PO.13: U1.P$AD8
PO.14: U1.P$AC9
PREVGH: D5.1 EPD_C9.2 J1.21
PREVGL: D2.2 EPD_C11.2 J1.23
RESE: J1.3 Q3.2 R1_EP_DR.2
RESET: J2.6 TP_RESET.TP U1.P$AC13
SCK: J1.13 U1.P$A12
SCL: IC1.B1 IC2.C1 IC3.12 R4.1 R17.2 TP_SCL.TP U1.P$M2 U3.7
SDA: IC1.C1 IC2.B2 IC3.2 R2.1 R18.2 TP_SDA.TP U1.P$L1 U3.8
SWDCLK: J2.4 TP_SWDCLK.TP U1.P$AA24
SWDIO: J2.2 TP_SWDIO.TP U1.P$AC24
SWO: TP_SWO.TP U1.P$AD22
VBAT: C27.2 C37.1 IC1.C2 TP_VBAT.TP U3.2 U3.3
VBUS: C21.1 C38.2 C42.2 C43.1 D3.5 IC1.A2 J4.A4_B9 J4.A9_B4 U1.P$AD2
VREG: C23.2 C24.2 C39.1 IC1.B2 IC9.A1 IC9.A2 IC9.A3 TP_VREG.TP

## Tracks (layer width: path | path; a pad name or v marks a point on that pad's centre or on a via)
3V3  (via drill 0.3 pad 0.3, 0.35)
  Top 0.127: 16.14,32.67 16.14,33.25 16.4,33.5 16.78,33.5 17.29,32.99 17.41,32.99 17.46,33.04 | R17.1 17.03,29.44 17,29.4 | 4.12,8.82 4.97,7.97 4.97,7.85 IC3.7
  Top 0.15: C34.2 39.92,6.52 | IC9.E2 16.14,32.67 IC9.E3 15.95,32.7
  Top 0.152: 32.91,12.47 U1.P$AD23 32.88,12.08 32.6,11.8 | U1.P$A22 32.45,18.87 32.45,19.17 33.14,19.86 33.14,20.43 32.72,20.85 | v7.53,8.16 6.25,6.88 | 15.38,27.15 v15.33,27.1
  Top 0.3: 26.18,13.22 26.52,13.57 26.62,13.47 26.88,13.73 U1.P$W1 26.93,13.93 27.28,13.58 U1.P$Y2 | 26.18,13.22 25.68,12.73 25.68,12.72 25.5,12.55 25.43,12.55 C6.1 25.53,11.77 v25.9,11.4 | 6.25,6.88 C19.1 | C19.1 6.34,6.64 5.65,5.95 5.65,5.75 5.2,5.3 4.9,5.3 4.51,5.69 IC3.3 | C19.1 6.55,6.57 6.55,6.3 7.06,5.79 7.06,4.29 7.25,4.11 7.39,4.11 R5.2 7.63,4.11 7.81,4.11 8.05,4.35 | 8.05,4.35 9.34,5.63 R8.2 21.55,6.45 23.5,8.4 27.4,8.4 | 27.4,8.4 31.7,8.4 | 31.7,8.4 32.6,8.4 35.94,11.74 Q1.2 | Q1.2 36.15,11.8 34.6,11.8 | 34.2,11.8 32.6,11.8 32.19,11.5 C8.1 31.59,11.7 30.84,11.7 C7.1 30.48,11.65 30.48,12.33 U1.P$AD14 | 34.2,11.8 34.6,11.8 | IC2.C2 39.91,7.77 39.91,7.66 39.34,7.1 | 39.34,7.1 38.6,7.1 37,8.7 37,10.95 Q1.2 | 39.92,6.52 39.34,7.1 | R7.2 33.55,5.42 33.37,5.42 31,7.79 31.09,7.79 31.7,8.4 | 14.5,28.7 15.8,28.7 16.05,28.95 16.85,28.95 | 14.5,28.7 14.32,28.7 13.9,29.12 12.38,29.12 11.51,29.99 9.29,29.99 C25.1 9.86,30.53 C33.1 9.06,28.37 9.06,26.96 7.7,25.6 6.91,25.6 4.11,28.4 TP_3V3.TP | v29.9,33.4 32.44,33.4 TP_3.3V.TP 31.55,32.51 31.55,28.85 31.6,28.8 | J2.1 34.62,27.8 34.3,27.8 33.9,27.4 33,27.4 31.6,28.8 | C12.1 32.72,20.85 32.72,22.82 32.21,23.32 31.88,23.32 31.8,23.4 | 31.8,23.4 30.9,24.3 30.9,28.1 31.6,28.8 | IC3.10 3.51,8.21 4.12,8.82 4.8,9.5 4.8,9.7 4.6,9.9 2.3,9.9 0.9,8.5 0.9,5.1 3,3 6.8,3 8.05,4.25 8.05,4.35 | 16.85,28.95 17.15,29.25 | 17.15,29.25 17,29.4 R17.1 | 31.8,23.4 31.4,23 31.2,23.2 30.9,23.2 29,21.3 25.9,21.3 25.3,20.7 25.3,19.7 25.45,19.55 26.55,19.55 C14.1 26.88,19.22 U1.P$B1 26.78,18.33 26.21,18.33 25.7,17.82 25.7,13.7 26.18,13.22 | R18.1 17.54,30.43 17.61,30.5
  Top 0.3: 17.61,30.5 18.23,31.12 18.23,32.28 17.46,33.04 17.32,33.18 | 17.15,29.25 17.3,29.39 17.51,29.39 17.8,29.69 17.8,30.11 17.61,30.3 17.61,30.5 | IC3.7 5.26,7.77 5.31,7.81 | 16.85,28.95 17.66,28.14 19.23,28.14 19.54,27.82 v19.74,27.82 | 27.4,8.4 26.5,9.3 v26.5,9.9 | 34.57,11.83 34.6,11.8 | 14.5,28.7 15.33,27.87 v15.33,27.1 | R_PWR_EPD.2 34.57,12.17 34.2,11.8
  Route63 0.127: v25.9,11.4 25.92,11.4 26,11.4
  Route63 0.3: v29.9,33.4 28.3,33.4 25.59,30.69 | 25.49,30.64 23.36,28.52 23.23,28.65 20.76,28.65 19.93,27.82 v19.74,27.82 | 26,11.4 26,10.39 v26.5,9.9
  Bottom 0.152: v7.53,8.16 6.98,8.71 6.98,9.06 8.53,10.61 8.53,14.25 16.6,22.32 16.6,25.82 15.63,26.79 15.63,26.8 v15.33,27.1
ALERT  (via drill 0.35)
  Top 0.152: v34.12,16.28 33.97,16.43 33.36,16.43 U1.P$J24 | U3.5 19.34,25.49 19.34,25.41 18.96,25.03 18.96,24.66 19.23,24.39 19.91,24.39 20.07,24.55 v21.85,24.55
  Bottom 0.152: v21.85,24.55 20.05,24.55 15.68,20.19 15.68,19.32 16.59,18.41 23.46,18.41 23.76,18.72 23.76,19.18 27.57,22.99 28.21,22.99 32.81,18.39 32.81,17.78 34.12,16.47 v34.12,16.28
D+  (via drill 0.15 pad 0.3)
  Top 0.15: 28.7,12.11 28.76,12.05 v28.7,12.05 | 28.7,12.11 U1.P$AD6 | 28.7,12.1 28.7,12.11 | D3.4 26.27,23.5 24.3,23.5 20.9,20.1 20.9,12.8 21,12.7 v21.6,12.7
  Route63 0.15: v21.6,12.7 25.6,12.7 27.9,10.4 28.7,11.2 v28.7,12.05
D-  (via drill 0.35)
  Top 0.152: v27.88,22.38 27.88,22.83 28.49,23.44 28.49,23.75 D3.6 | U1.P$AD4 27.88,12.47 27.88,12.32 28.89,11.31 28.89,9.97 28.47,9.55 v28.33,9.55
  Bottom 0.152: v28.33,9.55 28.29,9.6 28.29,12.58 27.67,13.19 27.67,22.17 v27.88,22.38
DEC1  (via drill 0.15)
  Top 0.127: v25.04,18.15 25.04,17.05 C5.1 | v27.07,17.88 27.02,17.93 U1.P$C1
  Bottom 0.127: v25.04,18.15 26.8,18.15 v27.07,17.88
DEC3  (via drill 0.15 pad 0.3)
  Top 0.152: C11.1 36.23,18 35.98,18 v35.85,18.12 | U1.P$D23 33.2,17.68 33.2,17.89 v33.17,17.93
  Bottom 0.152: v33.17,17.93 35.65,17.93 v35.85,18.12
DEC4_6  (via drill 0.35)
  Top 0.127: U1.P$B5 28.08,18.52 28.2,18.63 28.73,19.53 C10.1
  Top 0.152: C15.1 29.55,20.8 29.55,21.16 30.62,22.22 31.42,22.22 v31.99,22.8 | C10.1 28.8,20.12 29.19,20.4 C15.1 | C16.1 30.16,19.79 30.16,19.94 29.57,20.53 C15.1 | v30.32,23.9 30.12,23.9 27.98,21.77 27.57,21.77 27.42,21.92 27.12,21.92 L3.2 | v36.74,18.36 36.42,18.36 36.3,18.48 33.92,18.48 33.7,18.26 33.7,17.75 U1.P$E24
  Bottom 0.152: v30.32,23.9 31.72,22.5 31.99,22.5 | 31.99,22.5 v31.99,22.8 | 31.99,22.5 34.25,22.5 34.43,22.67 34.8,22.67 36.62,20.86 36.62,19.08 36.74,18.96 v36.74,18.36
DN  (via drill 0.35)
  Top 0.15: J4.A7 22.8,28.93 22.8,28.3 22.91,28.3 23.02,28.2 23.48,28.2 23.6,28.32 23.6,28.83 J4.B7
  Top 0.152: v28.49,25.12 28.49,26.34 D3.1 | v23.83,30.21 23.76,30.15 23.76,28.99 J4.B7
  Bottom 0.152: v28.49,25.12 26.18,27.43 26.18,27.62 23.83,29.97 v23.83,30.21
DP  (via drill 0.15 pad 0.3)
  Top 0.15: D3.3 26.55,26.35 v25.9,27 | v22.8,30.6 22.8,30.1 22.54,29.84
  Top 0.152: J4.B6 22.24,29.08 22.24,29.54 22.54,29.84 23,29.84 23.3,29.54 23.3,29.08 J4.A6
  Bottom 0.15: v22.8,30.6 25.9,27.5 v25.9,27
EPD_3V3  (via drill 0.15, 0.3 pad 0.3, 0.35)
  Top 0.127: v13.47,21.69 | v13.47,21.69 v13.48,21.7
  Top 0.15: C1-EP-DR.1 14.32,20.87 v13.48,21.7 13.39,21.79
  Top 0.152: v9.69,16.36 9.69,16.21 9.8,16.1
  Top 0.3: L5.2 19.3,16.8 19.3,19 19.6,19.3 v19.9,19.3 19.08,20.12 15.2,20.12 14.93,20.39 14.93,20.87 C1-EP-DR.1 13.23,20.87 13.04,20.68 12.97,20.68 EPD_C5.2 | Q1.3 37.96,12.4 v37,12.4 | J1.16 J1.15 10.47,16.1 9.8,16.1
  Route63 0.127: v37,12.4 36.37,12.59 36.3,12.5 | v13.47,21.69 13.38,21.78 10.38,24.78 | v13.47,21.69
  Route63 0.3: 8.9,16.9 8.9,23.3 10.38,24.78 | 13.38,21.78 13.59,21.99 | v19.9,19.3 20.2,19.3 20.6,18.9 20.6,12.4 24.63,8.37 32.37,8.37 36.4,12.4 v37,12.4
  Bottom 0.127: v13.47,21.69 13.5,21.72
  Bottom 0.152: v13.47,21.69 13.5,21.72 13.39,21.79 | v13.47,21.69 9.29,17.5 9.29,16.75 v9.69,16.36 | v13.47,21.69
EPD_BUSY  (via drill 0.15 pad 0.15, 0.3 pad 0.15)
  Top 0.127: J1.9 10.72,19.15 13.95,19.15 14.3,19.5 v14.6,19.5 | v30,12.5 29.95,12.5 U1.P$AD12
  Route63 0.127: v19.6,12.4 19.6,12.3 23.9,8 33,8 v33.2,8.2 | v32,9.3 30.2,11.1 30.2,12.3 v30,12.5
  Bottom 0.127: v19.6,12.4 19.6,14.5 v14.6,19.5 | v33.2,8.2 32.1,9.3 v32,9.3
EPD_CS  (via drill 0.3 pad 0.15)
  Top 0.127: 10.95,17.75 J1.12 10.78,17.9 11.5,17.9 11.5,18.1 v11.6,18.2 | v27.2,17 27.2,16.5 27.38,16.32 U1.P$K2
  Route63 0.127: v11.6,18.2 11.7,18.1 12.6,18.1 14.3,16.4 v19.8,16.4
  Bottom 0.127: v19.8,16.4 23.4,16.4 24.85,14.95 26.9,17 v27.2,17
EPD_DC  (via drill 0.3 pad 0.15)
  Top 0.127: v28.6,12.9 28.81,12.9 29.28,12.43 U1.P$AD10 | v12.3,18.7 11.18,18.7 11.18,18.2 10.68,18.2 J1.11
  Route63 0.127: v12.3,18.7 12.5,18.9 18,18.9 19,19.9 20.8,19.9 21.1,19.6 21.1,14.2 22.1,13.2 28.3,13.2 v28.6,12.9
EPD_RST  (via drill 0.15 pad 0.3)
  Top 0.15: J1.10 8.85,18.75 8.7,18.6 8.7,11.9 10.34,10.26 18.37,10.26 18.89,10.78 18.89,10.92 19.64,11.68 22.48,11.68 22.5,11.7 23,11.7 24.9,9.8 v24.9,9.7 | v29.4,13 29.56,13 U1.P$AC11
  Route63 0.3: v24.9,9.7 25.8,9.7 26.7,8.8 28.5,8.8 29.8,10.1 29.8,12.6 v29.4,13
GDR  (via drill 0.35)
  Top 0.152: R2_EP_DR.2 16.75,22.78 15.74,22.78 14.47,24.05 Q3.1 14.31,24.05 14.21,24.05 v13.25,25.02 | v9.74,22.68 10.5,22.68 J1.2
  Bottom 0.152: v9.74,22.68 10.71,22.68 13.05,25.02 v13.25,25.02
GND  (via drill 0.15 pad 0.15, 0.15 pad 0.3, 0.3 pad 0.15)
  Top 0.127: J1.17 10.95,15.25 11.7,16 12.92,16 13.02,16 | C10.2 29.7,19.79 v29.8,19.7 | v23,24.8 22.63,25.17 IC1.D2 | R9.1 19.91,23.66 18.74,23.66 v18.3,24.1
  Top 0.152: IC2.B1 39.26,8.34 38.9,8.7 | R3.1 4.01,4.54 4.05,4.54 4.2,4.39 4.2,4.3 | IC9.C3 IC9.C2 IC9.C1 | J2.3 J2.5 37.7,27.26 37.7,27 | 9.8,19.7 9.85,19.75 J1.8 11.4,19.75 | EPD_C2.1 11.87,23.1 EPD_C1.1 EPD_C5.1 11.87,20.22 11.4,19.75 | U1.P$B7 28.63,17.78 U1.P$75 | C14.2 26.8,20.2 26.2,20.2 | C21.2 27.59,10.2 27.1,10.2 | J4.A12_B1 19.25,28.98 J4.SH4 | C3.2 34.16,15.42 34.16,14.64 C9.2 | J4.A1_B12 26.77,29.55 J4.SH3 | 32.3,20.4 32.3,20.37 32.59,20.09 C12.2 | U3.1 17.64,26.96 17.84,26.76 17.84,26.51 U3.9 18.39,25.96 U3.6 | C13.2 31.61,19.88 31.38,19.88 31.04,19.54 C16.2 | U1.P$F23 32.23,17.18 U1.P$78 | U1.P$84 U1.P$74 | C4.2 34.23,18.05 C22.2 35.27,18.05 35.84,17.48 v35.84,17.38 | 11.87,19.7 EPD_C6.1 11.4,19.75 | EPD_C7.1 13.02,16.7 13.02,16 | 12.92,16 EPD_C8.1 12.87,15.2 EPD_C9.1 12.92,14.12 EPD_C10.1 | EPD_C11.1 | EPD_C11.1 11.82,10.85 EPD_C12.1 | v22.7,26.3 22.81,26.19 C38.1 23.92,25.78 25.22,24.48 C39.2 | v24.88,27.31 24.52,27.66 R2_USB.2 | R2_EP_DR.1 16.2,22.23 R_TYPE_SEL.1 16.9,21.73 17.3,22.14 v17.3,22.8 17.3,22.6
  Top 0.3: U3.4 17.94,25.46 v18.2,25.2
  other vias: 23.8,6.2 24.9,11.6 14.7,4.1 8.6,6.2 31.8,10.2 4.3,7 36.7,4.7 3.7,3.68 17.6,31.5 41,28.9 30,27.6 25.9,20.1 14.5,25.8 37.9,19.1 35.2,14.5 32.1,20.47 35.2,21.42 22.6,24.1 21.69,27.99
  pour Bottom: -6.5,39.1 51.7,39.1 51.9,38.9 51.9,-7.6 51.6,-7.9 -4.6,-7.9 -6.5,-6 -6.5,-7
  pour Top: -11,42.4 56.2,42.4 56.2,-13.7 56,-13.9 -10.7,-13.9 -11,-13.6
  pour Route2: -11.2,42.6 56,42.6 56,-13.6 -10.8,-13.6 -10.8,42.6 -11.1,42.6 -11,42.6
HAPTIC_EN  (via drill 0.15 pad 0.3)
  Top 0.15: U1.P$U1 26.73,14.43 v26.2,13.9 | IC2.A1 39.36,8.84 38.4,9.8 v37.75,9.8
  Bottom 0.15: v26.2,13.9 27.5,12.6 27.5,12.4 27.1,12.4 26.9,12.6 26.5,12.2 26.5,11.8 27,11.3 27,8.8 31.2,8.8 31.2,9.45 30.8,9.84 | v37.75,9.8 37.7,9.84 30.8,9.84 | 30.7,9.9 30.75,9.84 30.8,9.84
IMU_INT1  (via drill 0.15 pad 0.3)
  Top 0.15: U1.P$N1 26.73,15.43 v26.3,15
  Top 0.3: IC3.5 5.54,6.74 6.9,8.1 6.9,8.8 7.48,9.38 18.59,9.38 19.8,10.59 19.8,10.73 19.96,10.9 22.1,10.9 22.6,10.4 23.4,10.4 23.46,10.46 v23.56,10.46
  Bottom 0.15: v23.56,10.46 23.36,10.66 22.86,10.66 22.66,10.86 22.66,11.36 v26.3,15
IMU_INT2  (via drill 0.15 pad 0.3)
  Top 0.15: U1.P$P2 27.32,15.18 v27.3,15.2
  Top 0.3: IC3.6 5.11,7.31 5.41,7.31 5.74,7.64 5.74,7.99 5.3,8.43 5.3,8.8 6.2,9.7 6.6,9.7 6.7,9.8 7,9.8 7.11,9.91 18.51,9.91 19.38,10.77 19.38,10.91 19.79,11.32 22.7,11.32 v23.01,11.01
  Bottom 0.15: v27.3,15.2 27,15.2 23.3,11.5 23.3,11.3 v23.01,11.01
LX1  (via drill 0.3 pad 0.3)
  Top 0.15: IC9.B2 IC9.B3 15.23,31.47 15.21,31.49 v14.9,31.49
  Top 0.3: L7.1 13.13,33.04 v13.27,32.9
  Route63 0.3: v13.27,32.9 13.49,32.9 v14.9,31.49
LX2  (via drill 0.3 pad 0.3)
  Top 0.15: IC9.D2 IC9.D3 15.23,32.27
  Top 0.3: v15.2,32.3 15.23,32.27 | v14.3,33.3 14.3,33.1 13.77,32.57 13.77,32.32 13.61,32.16 12.96,32.16 L7.2
  Route63 0.3: v14.3,33.3 15.2,32.4 v15.2,32.3
MOSI  (via drill 0.3 pad 0.15)
  Top 0.127: J1.14 10.35,16.75 v9.8,17.3 | U1.P$B13 30.13,18.47 v30.1,18.5
  Route63 0.127: v9.8,17.3 12.6,17.3 14.4,15.5 v19.7,15.5 | v21.8,19.8 21.8,15.9 v22,15.7 | v24.6,20.7 25.4,19.9 25.4,19.6 26.5,19.6 v28.7,21.8
  Bottom 0.127: v22,15.7 21.8,15.5 v19.7,15.5 | v21.8,19.8 22.7,20.7 v24.6,20.7 | v28.7,21.8 28.7,21.5 30.2,20 30.2,18.6 v30.1,18.5
N$1  (via drill 0.15 pad 0.3)
  Top 0.152: v39.2,18.5 38.3,17.6 37.68,17.6 L1.2 36.41,16.28 35.8,16.89 35.45,16.89 35,17.34 C22.1 34.23,17.54 C4.1 | v40.06,17.56 40.56,18.06 ANT1.1
  Bottom 0.152: 39.4,18.3 v39.2,18.5 40.06,17.64 v40.06,17.56
N$2  (via drill 0.15 pad 0.3)
  Top 0.15: R4.2 1.98,7.47 v2.4,7.9
  Top 0.3: IC9.D1 16.8,32.28 16.94,32.28 17.15,32.5 v17.4,32.5
  Route63 0.3: v2.4,7.9 4.67,10.17 7.18,10.17 7.56,10.56 7.56,30.96 10.9,34.3 16.18,34.3 18.3,32.19 18.3,31.6 v17.4,32.5
N$3  (via drill 0.15 pad 0.3)
  Top 0.3: R9.2 20.8,23.6 20.97,23.43 v21.17,23.43 | IC1.D1 21.06,25.1 v20.5,25.1
  Route63 0.3: v20.5,25.1 20.67,24.93 20.67,23.93 v21.17,23.43
N$4  (via drill 0.35)
  Top 0.152: U1.P$A23 32.91,19.02 33.41,19.53 33.41,21.15 33.98,21.71 34.71,21.71 35.06,22.06 | v30.93,21.71 30.93,21.46 31.38,21 31.69,21 C2.1 | X1.3 35.69,21.43 35.06,22.06 | 35.06,22.06 34.9,22.21 v34.62,22.21
  Bottom 0.152: v34.62,22.21 31.43,22.21 v30.93,21.71
N$5  (via drill 0.15 pad 0.3)
  Top 0.15: IC9.E1 16.78,32.92 v16.6,33.1 | v4.6,3.9 R2.2
  Route63 0.15: v4.6,3.9 8.2,7.5 8.2,30.3 8.8,30.9 | 8.8,30.9 8.8,31 | 8.8,30.9 11.8,33.9 15.8,33.9 v16.6,33.1
N$6
  Top 0.15: J4.A5 24.25,28.46 24.05,28.26 23.97,28.26 23.85,28.14 23.74,28.04 23.71,28.04 23.6,27.92 22.66,27.92 R1_USB.2
N$7  (via drill 0.15)
  Top 0.127: v25.54,21.56 25.92,21.95 L3.1 | v26.07,20.77 26.13,20.83 27.55,20.83 27.82,20.55 L2.2
  Route63 0.127: v26.07,20.77 25.54,21.31 v25.54,21.56
N$8
  Top 0.152: R3.2 3.7,4.31 3.49,4.31 2.73,5.07 2.73,5.68 3.19,6.14 3.49,6.14 IC3.1
N$9
  Top 0.152: U1.P$B24 33.36,18.41 34.28,19.33 X1.1 34.5,19.43 35.13,18.81 36.25,18.81 36.87,19.43 36.87,20.4 C1.1
N$10
  Top 0.152: C3.1 34.59,15.32 34.44,15.06 35.19,15.06 35.34,15.21 35.34,15.98 35.5,16.13 35.5,16.28 L1.1 35.34,16.43 34.62,16.43 34.31,16.73 33.26,16.73 33.2,16.68 U1.P$H23
N$11
  Top 0.152: IC2.A2 40.07,8.81 40.07,9.88 40.53,10.34 C32.2
N$13  (via drill 0.3 pad 0.15, 0.35)
  Top 0.152: v19.29,9.12 19.52,9.12 19.65,9.25 19.65,9.77 C2-EP-DR.1 | D4.2 D2.1 14.75,7.55 v16,8.8
  Route63 0.152: v16,8.8 16.32,9.12 v19.29,9.12
N$14
  Top 0.127: C9.1 33.7,14.59 33.7,15.06 33.41,15.34 U1.P$N24
N$15
  Top 0.152: R_TYPE_SEL.2 16.98,20.98 17.51,21.52 17.51,21.67 18.63,22.79 | 18.63,22.79 18.68,22.83 SJ1.2 | R1_EP_DR.1 17.66,23.95 18.3,23.3 18.58,22.83 18.63,22.79
N$16  (via drill 0.35)
  Top 0.152: v15.93,13.19 15.93,14.05 14.16,15.82 14.16,16.2 L5.1 | C2-EP-DR.2 21.38,10.19 v20.36,9.17 | v15.23,24.66 15.23,23.9 15.84,23.29 16.45,23.29 Q3.3 | v17.06,12.17 17.82,11.4 17.97,11.4 D5.2 | v13.4,28.17 14.42,27.15 v14.42,27.1
  Bottom 0.152: v15.93,13.19 15.93,12.89 16.66,12.17 v17.06,12.17 17.36,12.17 v20.36,9.17 20.36,8.61 19.34,7.59 6.68,7.59 5.84,8.44 7.46,10.06 7.46,21.77 13.4,27.71 v13.4,28.17 | v14.42,27.1 15.23,26.29 v15.23,24.66
N$17
  Top 0.152: J1.4 10.5,21.77 10.2,21.77 9.89,22.07 9.44,22.07 9.13,22.38 9.13,22.99 9.89,23.75 12.16,23.75 12.66,23.25 EPD_C2.2
N$18  (via drill 0.35)
  Top 0.152: v9.74,21.31 10.5,21.31 J1.5 | EPD_C1.2 12.78,22.06 13.32,22.61 13.32,23.98 v13.45,24.11
  Bottom 0.152: v13.45,24.11 12.55,24.11 v9.75,21.31 v9.74,21.31
N$20  (via drill 0.15 pad 0.3)
  Top 0.15: U1.P$AC5 28,12.8 26.4,12.8 26.4,12.1 v26.9,12.1 | v29.25,11.62 29.25,11 C20.1
  Bottom 0.15: 30.75,9.45 29.8,10.4 29.8,11.08 v29.25,11.62 | v26.9,12.1 27.28,11.72 27.28,9.96 28.14,9.1 30.4,9.1 30.75,9.45 | 30.75,9.45 30.78,9.48
N$22
  Top 0.152: U1.P$B3 27.72,18.41 27.72,19.18 27.86,19.32 L2.1
N$26
  Top 0.15: J4.B5 21.25,27.82 21.25,27.3 21.37,27.18 21.78,27.18 21.9,27.3 23.6,27.3 R2_USB.1
N$30  (via drill 0.35)
  Top 0.152: J1.18 10.5,14.76 10.23,14.76 9.42,15.57 v9.18,15.57 | EPD_C6.2 13.09,20.02 13.15,20.02 13.37,20.24 14.51,20.24 15.56,19.19 16.06,19.19 v16.39,19.52
  Bottom 0.152: v16.39,19.52 16.39,20.09 20.71,20.09 24.01,23.39 24.01,28.22 21.17,31.06 17.06,31.06 16.76,30.76 15.07,30.76 14.16,29.84 14.16,28.02 8.93,22.79 8.93,15.57 v9.18,15.57
N$31  (via drill 0.3 pad 0.15)
  Top 0.127: EPD_C7.2 11.87,16.27 v11.7,16.1
  Top 0.152: J1.19 10.05,14.25 10,14.3 9.5,14.3 v9.3,14.1
  Route63 0.127: v9.3,14.1 9.6,14.1 11.6,16.1 v11.7,16.1
N$32
  Top 0.152: J1.20 11.05,13.75 11.2,13.9 11.2,14.8 11.65,15.25 EPD_C8.2
N$34
  Top 0.152: 10.68,12.8 J1.22 11.15,12.75 11.2,12.7 11.56,12.7 EPD_C10.2
N$35
  Top 0.152: U1.P$A18 31.38,19.02 31.38,19.33 31.48,19.42 C13.1
N$37
  Top 0.152: EPD_C12.2 10.62,11 J1.24
OUT+
  Top 0.152: IC2.A3 40.53,8.81 41.59,9.88 42.36,9.88 TP_OP.TP
OUT-
  Top 0.152: IC2.C3 40.53,7.75 40.98,7.75 42.36,6.38 42.66,6.38 TP_ON.TP
P0.00/XL1  (via drill 0.15)
  Top 0.127: U1.P$D2 27.45,17.75 27.45,19.66 27.57,19.79 28.24,19.79 28.39,19.93 28.39,20.42 v28.68,20.71 | v25.13,19.17 24.22,19.17
  Top 0.152: 24.22,19.02 24.22,18.26 24.05,18.09 X2.1 | 24.22,19.02 24.22,19.17 | 24.22,19.02 C17.2
  Route63 0.127: v28.68,20.71 28.58,20.81 26.94,19.17 v25.13,19.17
P0.01/XL2  (via drill 0.15 pad 0.3)
  Top 0.152: C18.2 24.22,14.15 24.22,14.91 24.07,15.06 X2.2 24.76,15.36 v25.1,15.7 | U1.P$F2 27.13,17.43 26.57,17.43 v26.55,17.41
  Bottom 0.152: v25.1,15.7 26.55,17.14 v26.55,17.41
P0.13  (via drill 0.35)
  Top 0.152: v8.12,5.28 7.51,4.67 R5.1 | v11.42,3.02 10.5,3.94 SW_UP.2 | C30.2 6.24,5.07 5.47,4.31 v5.47,3.95
  Bottom 0.152: v11.42,3.02 11.42,3.07 9.22,5.28 v8.12,5.28 7.46,4.62 6.14,4.62 v5.47,3.95
P0.14
  Top 0.152: 21.63,5 21.63,3.94 SW_ENT.2 | 21.63,5 22.09,5.46 22.09,5.61 22.85,6.38 C31.2 | 21.63,5 R8.1
P1.01  (via drill 0.15 pad 0.3)
  Top 0.15: U1.P$Y23 v32.9,13.7 | v34.1,13.2 v34.11,13.2 34.47,12.84 R_PWR_EPD.1
  Top 0.152: R_PWR_EPD.1 34.69,12.84 36.17,14.32 Q1.1
  Route63 0.15: v32.9,13.7 33.6,13.7 v34.1,13.2
P1.02  (via drill 0.15 pad 0.3, 0.35)
  Top 0.127: 33.7,8.3 33.67,8.36 33.67,8.74 v33.7,8.8
  Top 0.152: C29.2 34.73,5.31 34.28,5.77 33.82,5.77 R7.1 33.67,5.92 v33.67,6.53 33.67,8.27 33.7,8.3 | v33.36,3.02 32.45,3.94 SW_DN.2 | U1.P$W24 34.57,13.93 v34.6,13.9
  Bottom 0.152: v33.67,6.53 33.67,3.33 v33.36,3.02 | v33.7,8.8 38.1,8.8 38.2,8.9 38.2,11 38.1,11.1 35.5,11.1 34.6,12 v34.6,13.9
PMIC_INT  (via drill 0.15 pad 0.3)
  Top 0.15: U1.P$T2 27.38,14.28 v27.3,14.2 | IC1.A1 21.13,26.42 20.75,26.8 v20.54,26.8
  Route63 0.127: 26.27,16.43 26.17,16.33 25.72,15.88 25.72,14.74 26.67,14.2 v27.3,14.2
  Route63 0.15: 26.27,16.43 27.3,15.4 | v20.54,26.8 20,26.26 20,22.5 26.17,16.33
PREVGH  (via drill 0.35)
  Top 0.152: v15.2,12.4 15.2,11.85 D5.1 | v9.57,13.05 9.76,13.23 10.5,13.23 J1.21 10.99,13.25 EPD_C9.2
  Bottom 0.127: 9.74,13.75 12.15,16.16 13.45,16.16 15.2,14.4 v15.2,12.4
  Bottom 0.152: 9.74,13.75 9.74,13.05 v9.57,13.05
PREVGL  (via drill 0.35)
  Top 0.152: v9.64,11.62 9.69,11.62 10.32,12.25 J1.23 10.72,12.15 11.72,12.15 EPD_C11.2 | v19.04,8.2 18.8,8.44 D2.2
  Bottom 0.152: v9.64,11.62 12.39,11.62 12.6,11.82 12.85,11.57 13.6,12.32 14.01,11.91 14.01,11.43 | 14.01,11.43 14.25,11.68 | v19.04,8.2 15.64,8.2 14.01,9.83 14.01,11.43
RESE  (via drill 0.15 pad 0.3, 0.35)
  Top 0.152: v15.99,24.05 17.15,24.05 R1_EP_DR.2 | v15.38,22.07 14.92,22.53 14.47,22.53 Q3.2 | v11.3,22.3 10.68,22.3 J1.3
  Bottom 0.152: v15.99,24.05 15.99,22.68 v15.38,22.07 15.15,22.3 v11.3,22.3
RESET  (via drill 0.15 pad 0.3, 0.3 pad 0.3)
  Top 0.15: J2.6 37.93,28.3 40.3,28.3 41,27.6 41,21.3 39.9,20.2 39.9,18 39.61,17.71 39.61,12.61 37.8,10.8 37.63,10.8 v37.5,10.67 | v30.5,13 30.43,12.93 U1.P$AC13
  Top 0.152: J2.6 37.33,28.93 37.33,29.34 40.22,32.23 40.22,32.75 TP_RESET.TP
  Bottom 0.15: v30.5,13 30.5,11.98 31.81,10.67 v37.5,10.67
SCK  (via drill 0.15 pad 0.15, 0.3 pad 0.15)
  Top 0.127: J1.13 10.78,17.4 12.5,17.4 v13.3,18.2 | v29.1,19.3 29.51,19.3 U1.P$A12
  Route63 0.127: v19.9,17.6 19.3,18.2 v13.3,18.2 | v25.7,18.6 26.8,18.6 27.5,19.3 v29.1,19.3
  Bottom 0.127: v19.9,17.6 23.8,17.6 24.8,18.6 v25.7,18.6
SCL  (via drill 0.15 pad 0.15, 0.35)
  Top 0.152: 20.26,26.49 19.18,26.49 U3.7 | IC1.B1 21.07,26.03 21.02,26.03 20.66,26.39 20.36,26.39 20.26,26.49 | R4.1 2.58,6.75 3.34,6.75 IC3.12 3.34,6.74 v2.05,5.46 | v38.85,8.05 39,7.9 39.46,7.9 IC2.C1 | v42.21,21.63 42.21,22.69 42.96,23.44 42.96,23.9 TP_SCL.TP | v14.01,30.61 14.01,30.45 v15.07,29.39 16.29,29.39 16.35,29.45 R17.2 | v18.88,27.64 19.18,27.64 19.52,27.31 19.76,27.31 19.99,27.08 19.99,26.76 20.26,26.49 | v27.3,16.15 27.3,15.76 U1.P$M2
  Route63 0.152: v27.3,16.15 27,16.15 26,17.15 26,17.7 26.4,18.1 26.5,18 26.6,18 27.6,19 37.1,19 39.4,21.3 39.4,22.7 39.6,22.9 40.94,22.9 v42.21,21.63
  Bottom 0.152: 38.55,18.35 38.55,18.45 41.73,21.63 v42.21,21.63 42.21,24.36 43.73,25.88 44.34,25.88 44.64,25.58 44.64,12.47 39.31,7.14 33.36,7.14 33.11,6.88 5.57,6.88 3.55,4.86 2.66,4.86 v2.05,5.46 | 38.55,18.35 38.55,8.35 v38.85,8.05 | v14.01,30.61 14.47,30.61 14.92,31.06 16.66,31.06 17.45,31.85 22.97,31.85 30.32,24.51 32.6,24.51 34.16,22.95 34.92,22.95 37.3,20.57 37.3,18.07 36.24,17.02 35.72,17.02 32.54,13.84 32.54,13.63 31.09,12.18 31.09,11.78 31.98,11.78 38.55,18.35 | v15.07,29.39 16.18,29.39 17.12,30.33 17.48,30.33 17.73,30.08 17.73,28.41 17.97,28.17 18.63,28.17 18.88,27.91 v18.88,27.64
SDA  (via drill 0.15 pad 0.3, 0.3, 0.35)
  Top 0.15: R18.2 16.53,29.9 v17.3,29.9 | U1.P$L1 26.75,15.8 v26.3,15.7 | IC2.B2 39.98,8.38 v40,8.4
  Top 0.152: 4.1,5.38 4.56,4.92 R2.1 | 4.1,5.38 4.1,6.14 IC3.2 | v16.8,27.76 17.46,27.76 17.97,27.25 18.58,27.25 18.87,26.96 U3.8 | IC1.C1 21.07,25.58 20.25,25.58 19.52,24.84 v19.42,24.84 | v3.34,5.38 4.1,5.38 | v44.03,25.27 43.57,25.73 43.57,25.88 43.12,26.34 TP_SDA.TP
  Bottom 0.15: v17.3,29.9 17.3,28.16 16.9,27.76 | v26.3,15.7 24.12,13.72 20.82,13.72 20.22,13.72 | v40,8.4 40.11,8.4 40.16,8.44
  Bottom 0.152: 20.11,25.73 18.08,27.76 16.9,27.76 v16.8,27.76 | v3.34,5.38 3.41,5.38 5.22,7.19 19.39,7.19 20.87,8.66 | 20.87,8.66 20.87,13.08 20.22,13.72 | 20.82,13.72 15.38,19.17 15.38,20.34 19.8,24.76 19.8,25.43 20.11,25.73 | 20.11,25.73 20.26,25.88 20.26,25.68 v19.42,24.84 | v44.03,25.27 44.03,12.32 40.16,8.44 39.15,7.44 22.09,7.44 20.87,8.66
SWDCLK  (via drill 0.15 pad 0.3)
  Top 0.15: TP_SWDCLK.TP 37.7,34.6 37.8,34.7 40.4,34.7 40.6,34.5 41.2,34.5 42,33.7 42.6,33.7 44.9,31.4 44.9,30.1 45.5,29.5 45.5,21.2 44.9,20.6 41.4,20.6 v41.3,20.5 | v40.1,21.6 40,21.6 39.6,21.2 39.6,18.4 34.75,13.55 34.36,13.55 34.35,13.55 33.5,13.55 U1.P$AA24
  Top 0.152: TP_SWDCLK.TP 37.63,33.35 37.02,33.35 35.18,31.51 35.18,29.78 J2.4
  Route63 0.15: v40.1,21.6 41.2,20.5 v41.3,20.5
SWDIO  (via drill 0.15 pad 0.3, 0.3)
  Top 0.127: 34.05,33.63 34.05,33.25 33.16,32.36 33.03,32.36 32.91,32.23 32.78,32.23 32.02,31.47 32.02,29.44 32.14,29.31 v32.2,29.3
  Top 0.15: 30.8,31.5 30.8,29.9 | U1.P$AC24 33.78,12.53 36.33,12.53 37,13.2 v37,15.2
  Top 0.152: 34.89,33.35 35.04,33.5 TP_SWDIO.TP 34.09,33.59 34.05,33.63 33.01,34.67 29.03,34.67 29,34.7 28.45,34.15 28.45,33.85 30.8,31.5 | 34.89,28.93 J2.2 34.47,29.22 32.98,29.22 32.9,29.3 v32.2,29.3 | 30.8,29.9 v30.9,29.8
  Route63 0.15: 41.5,19.7 v37,15.2 42.9,21.1 42.9,21.8 35.4,29.3 v32.2,29.3
  Route63 0.152: v30.9,29.8 31.8,29.8 32.2,29.4
SWO  (via drill 0.15 pad 0.3)
  Top 0.15: v31.64,12.14 31.65,12.13 32.01,12.13 32.31,12.43 U1.P$AD22 | v42.5,32.9 42.85,32.9 42.95,32.8 42.95,31.4 42.77,31.4 TP_SWO.TP
  Bottom 0.15: v31.64,12.14 31.84,12.14 41.7,22 41.7,32.7 41.9,32.9 v42.5,32.9
VBAT
  Top 0.127: 21.09,22.48 C37.1
  Top 0.15: C27.2 15.66,26.34 16.2,25.8 | IC1.C2 22.91,25.57 23.68,24.8
  Top 0.152: TP_VBAT.TP 11.42,28.32 11.88,28.32 12,28.4
  Top 0.3: 22.6,24.03 23.68,24.03 23.68,24.8 | U3.2 16.86,26.46 16.55,26.15 | 16.55,26.15 16.2,25.8 16.2,25 16.5,24.7 18.42,24.7 19.1,24.03 22.6,24.03 | U3.3 16.74,25.96 16.55,26.15 | C27.2 14.05,26.34 12,28.4 | C37.1 21.07,22.5 22.6,24.03
VBUS
  Top 0.15: 30.24,31.36 C42.2 | 22.07,26.37 21.9,26.37 21.8,26.37 IC1.A2
  Top 0.152: C21.1 27.33,11.73 27.33,11.92
  Top 0.3: J4.A4_B9 25.6,28.78 25.6,28.27 25.77,28.1 | 25.77,28.1 26.62,28.1 26.63,28.1 27.36,28.1 C43.1 28.41,27.85 28.41,27.93 30.24,29.76 30.24,31.36 | J4.A9_B4 20.8,28.78 20.8,27.25 21.68,26.37 21.8,26.37 | 25.77,28.1 25.57,28.1 25.37,27.9 25.37,27.1 25.27,27 | 25.27,26.56 25.27,26.54 C38.2 | 25.27,27 25.27,26.56 | 25.27,26.56 25.68,26.15 | 25.68,26.15 25.69,26.15 26.02,25.82 | 25.68,26.15 26.02,25.82 | 26.02,25.82 26.02,25.62 26.2,25.45 26.35,25.45 27.57,24.23 D3.5 27.57,23.17 27.04,22.64 25.64,22.64 25.39,22.39 25.39,22.36 21.4,18.37 21.4,14.1 24.6,10.9 26.3,10.9 27.33,11.92 27.33,12.38 U1.P$AD2 | 25.27,27 25.14,26.87 22.4,26.87 21.9,26.37
VREG  (via drill 0.3 pad 0.3, 0.35)
  Top 0.15: IC9.A1 IC9.A2 IC9.A3 | 23.55,25.61 23.34,25.61 23.09,25.87 21.63,25.87 IC1.B2
  Top 0.152: v15.38,33.2 15.33,33.25 | v19.24,32.4 19.24,32.28
  Top 0.3: TP_VREG.TP 8.85,32.69 C24.2 8.93,33.93 9.54,34.54 13.88,34.54 14.88,33.54 14.88,32.84 14.6,32.56 14.6,32.52 | 15.15,30.55 v15.8,29.9 | IC9.A3 15.46,30.55 15.15,30.55 | 15.15,30.55 14.95,30.55 14.32,31.18 14.32,31.84 14.6,32.12 14.6,32.52 | 14.6,32.52 15.33,33.25 15.96,33.88 C23.2 | 19.24,32.28 v20.91,30.61 | 23.55,25.61 24.22,24.94 C39.1 24.22,23.96 23.86,23.6 23.24,23.6 v23.16,23.52
  Route63 0.3: v15.8,29.9 15.8,29.8 18.61,26.99 19.9,26.99 20.47,27.55 20.73,27.55 21.2,27.09 21.2,24.2
  Bottom 0.152: v20.91,30.61 21.07,30.45 21.07,26.08 23.13,24.02 v23.16,23.52 | v15.38,33.2 16.43,32.15 18.98,32.15 v19.24,32.4